# Altium PCB radxa_cm3_io_board_v1330.PcbDoc (part 7 of 8)
Units mil, origin at the board's own origin, x right, y up, seen from the top; angles counter-clockwise.
Board outline 6299.61 x 3544.09 mil, 4 copper layers (Top, GND, Power, Bottom), stack 35.4 mil thick; 547 components, 411 nets, 1952 pads, 2650 vias.
Unrouted connection lines stored in the file: 280.
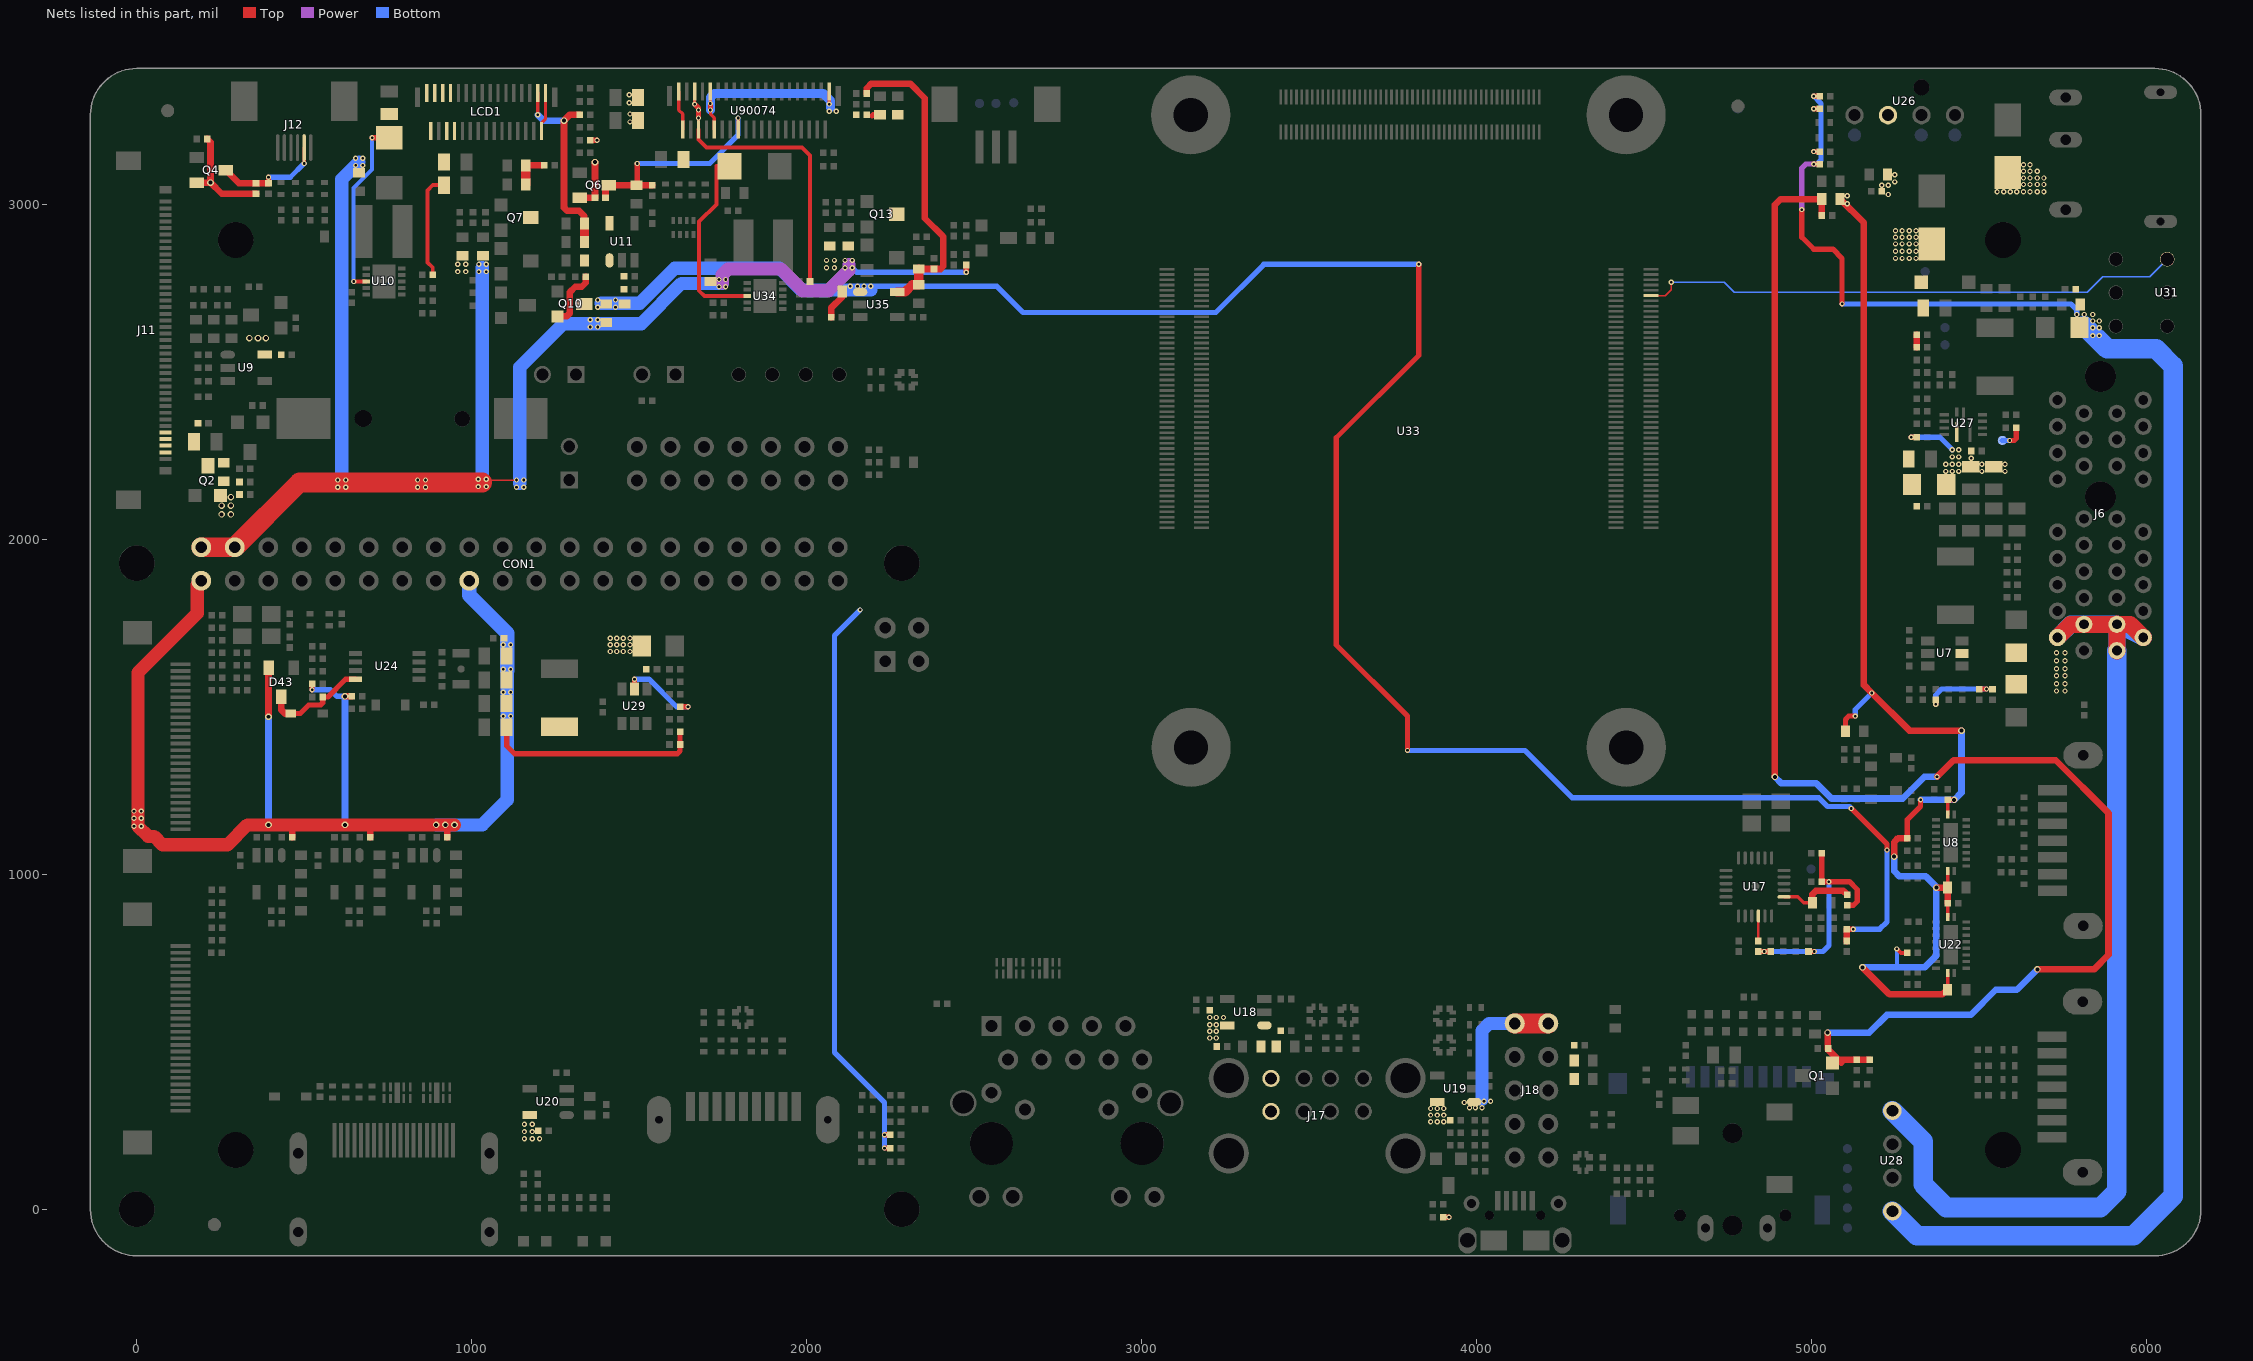
[diagram p9: the nets of this part, all layers, seen from the top]

## Via types
v1: diameter 15.75, hole 7.87, Top to Bottom, 2618 vias
v2: diameter 19.68, hole 11.81, Top to Bottom, 32 vias

## Nets (pads, with @x,y where several pads share a name; then routed paths per layer and width w, separated by ;. In a path a pad name is that pad's centre, name@x,y a point inside that pad or via, vN(x,y) a via of type N, cw(c..) or ccw(c..) an arc to the next point about the centre after c; other vN are vias at no path point) (continued)
VCC3V3_SYS: C29.1 C30.1 C45.1 C109.1 C111.1 C148.1 C149.1 C150.1 C154.1 C155.1 C156.1 CON1.1 CON1.17 D43.2 FB2.1 FB3.1 FB4.1 L13.2 Q4.2 Q6.2 R4.2 R10.2 R44.1 R47.2 R61.1 R62.1 R63.2 R138.2 R139.1 R144.1 R157.1 R169.2 R197.1 R207.1 R209.1 R213.1 R9212.2 U8.9 U8.20 U9.5 U22.9 U22.20 | length 10697.2
  Top w3.94: v1(-7.87,1143.7) 3.94,1143.7 ; v1(-7.87,1188.98) -6.12,1188.98 3.94,1178.92
  Top w9.84: C109.1@5405.51,655.51 U22.9@5405.51,705.51 ; U22.20@5405.51,873.23 C111.1@5405.51,913.39 ; C29.1@5405.51,960.63 U8.9@5405.51,1010.63 ; U8.20@5405.51,1178.35 C30.1@5405.51,1222.44
  Top w11.81: v1(5253.94,777.56) 5265.75,765.75 R209.1@5285.43,765.75
  Top w15.75: v1(523.62,1551.18) R138.2@523.62,1568.9 ; C155.1@1104.33,1438.98 1104.33,1383.86 1127.95,1360.24 1614.17,1360.24 1622.05,1368.11 R157.1@1622.05,1387.8 C148.1@1622.05,1425.2 ; R63.2@1354.33,3190.94 v1(1374.02,3190.94) ; v1(2232.28,183.07) R4.2@2250,183.07 ; v1(2232.28,222.44) R10.2@2250,222.44 ; v1(5005.91,3157.48) R213.1@5023.62,3157.48 ; v1(5005.91,3285.43) R144.1@5023.62,3285.43 ; R169.2@5100.39,1427.17 5100.39,1462.6 5110.24,1472.44 v1(5129.92,1472.44) ; R207.1@5285.43,1108.27 5285.43,1163.39 5324.8,1202.76 v1(5324.8,1222.44) ; C30.1@5405.51,1222.44 v2(5425.2,1222.44)
  Top w19.68: Q4.2@179.13,3064.96 v2(220.47,3064.96) ; R47.2@210.63,3194.88 220.47,3185.04 v2(220.47,3064.96) ; R44.1@356.3,3031.5 253.94,3031.5 v2(220.47,3064.96) ; v2(393.7,1470.47) D43.2@393.7,1616.14 ; FB3.1@464.57,1110.24 464.57,1147.64 ; v2(622.05,1531.5) R139.1@641.73,1531.5 ; FB4.1@696.85,1110.24 696.85,1147.64 ; FB2.1@927.17,1110.24 v2@927.17,1147.64 ; Q6.2@1322.83,3019.69 R61.1@1368.11,3019.68 v2(1368.11,3125.98) ; R9212.2@5084.65,3015.75 5155.51,2944.88 5155.51,1564.96 v1(5179.13,1541.34) 5291.34,1429.13 v2(5446.85,1429.13) ; v2(5151.57,722.44) 5232.28,641.73 5389.76,641.73 5401.57,653.54 C109.1@5405.51,655.51 ; v2(5246.06,1053.15) 5246.06,1096.46 5257.87,1108.27 R207.1@5285.43,1108.27 ; C111.1@5405.51,913.39 C29.1@5405.51,959.77 ; C29.1@5402.69,960.63 C29.1@5405.51,960.63 ; C29.1@5402.69,960.63 C29.1@5405.51,959.77 ; C29.1@5402.69,960.63 v2(5372.05,960.63) C29.1@5405.51,960.63 ; C29.1@5405.51,959.77 C29.1@5405.51,960.63
  Top w39.37: CON1.1@192.91,1876.38 181.1,1864.57 181.1,1779.53 3.94,1602.36 3.94,1178.92 3.94,1143.7 34.45,1113.19 52.17,1113.19 76.77,1088.58 271.65,1088.58 330.71,1147.64 v2(393.7,1147.64) 464.57,1147.64 v2(622.05,1147.64) 696.85,1147.64 v2(893.7,1147.64) v2(921.26,1147.64) 927.17,1147.64 v2(948.82,1147.64)
  Bottom w3.94: v1(1094.49,1543.31) 1106.3,1555.12 1108.27,1557.09 1108.27,1561.02 1106.3,1562.99 ; v1(1094.49,1612.2) 1106.3,1600.39
  Bottom w11.81: 5253.94,722.44 v1(5253.94,777.56)
  Bottom w15.75: v1(523.62,1551.18) 578.74,1551.18 598.43,1531.5 v2(622.05,1531.5) ; v1(2159.45,1789.37) 2082.68,1712.6 2082.68,468.5 2232.28,318.9 v1(2232.28,183.07) ; v1(5129.92,1472.44) 5129.92,1492.13 v1(5179.13,1541.34)
  Bottom w19.68: v2(393.7,1147.64) v2(393.7,1470.47) ; v2(622.05,1147.64) v2(622.05,1531.5) ; v2(5151.57,722.44) 5253.94,722.44 5336.61,722.44 5372.05,757.87 v2(5372.05,960.63) 5372.05,962.6 5340.55,994.09 5261.81,994.09 5246.06,1009.84 v2(5246.06,1053.15) ; v1(5324.8,1222.44) v2(5425.2,1222.44) 5446.85,1244.09 v2(5446.85,1429.13)
  Bottom w31.5: 1106.3,1608.27 v1@1112.2,1608.27
  Bottom w39.37: v2(893.7,1147.64) v2(921.26,1147.64) v2(948.82,1147.64) 1031.5,1147.64 1106.3,1222.44 1106.3,1555.12 1106.3,1562.99 1106.3,1600.39 1106.3,1608.27
  Bottom w43.31: CON1.17@992.91,1876.38 992.91,1832.68 1106.3,1719.29 1106.3,1608.27
  other v1: 13.78,1143.7 -7.87,1167.32 13.78,1167.32 13.78,1188.98 1094.49,1472.44 1116.14,1472.44 1116.14,1543.31 1116.14,1612.2 1094.49,1685.04 1116.14,1685.04 958.66,2799.21 982.28,2799.21 2059.06,2811.02 2082.68,2811.02 958.66,2820.87 982.28,2820.87 2059.06,2832.68 2082.68,2832.68 5106.3,3001.97 5106.3,3025.59
  other v2: 336.61,2600.39 362.2,2600.39 385.83,2600.39
VCC3V3_TP: C48.1 J12.2 Q4.3 R44.2 | length 332.6
  Top w9.84: v1(500,3122.05) J12.2@500,3169.29
  Top w15.75: C48.1@393.7,3062.99 v1(393.7,3080.71)
  Top w19.68: Q4.3@265.75,3102.36 305.12,3062.99 R44.2@356.3,3062.99 C48.1@393.7,3062.99
  Bottom w15.75: v1(393.7,3080.71) 458.66,3080.71 v1(500,3122.05)
VCC5V0_USB: C91.1 C95.1 C99.1 C130.1 C131.1 CON1.2 CON1.4 FB1.1 FB5.1 Q10.2 R64.1 R113.1 R118.1 R148.1 R162.2 R163.2 R198.1 R211.1 R217.1 R223.1 U18.5 U19.5 U20.5 U28.4 | length 10362.8
  Top w3.94: v1(600.39,2155.51) 600.39,2169.29 v1(600.39,2177.17) 608.27,2169.29 610.24,2167.32 612.2,2169.29 620.08,2177.17 v1(624.02,2177.17) 624.02,2169.29 v1(624.02,2155.51) ; v1(838.58,2155.51) 848.76,2165.69 ; v1(838.58,2177.17) 838.58,2175.87 845.16,2169.29 848.76,2165.69 ; 850.39,2169.29 850.39,2167.32 848.76,2165.69 ; 860.24,2169.29 862.2,2167.32 ; v1(862.2,2155.51) 862.2,2167.32 ; v1(862.2,2177.17) 862.2,2169.29 862.2,2167.32 ; v1(1019.69,2157.48) 1031.5,2169.29 1041.34,2179.13 v1(1043.31,2179.13) 1043.31,2177.17 v1(1133.86,2177.17)
  Top w15.75: v1(2476.38,2797.24) R223.1@2476.38,2818.9 ; R118.1@3899.61,-23.62 v1(3917.32,-23.62) ; v1(4970.47,2984.25) 4970.47,2901.57 5005.91,2866.14 5062.99,2866.14 5090.55,2838.58 v1(5090.55,2702.76) ; v1(5005.91,3120.08) R217.1@5023.62,3120.08 ; v1(5005.91,3322.83) R211.1@5023.62,3322.83
  Top w19.68: Q10.2@1256.28,2665.26 1256.37,2665.35 1283.46,2665.35 1293.31,2675.2 1293.31,2738.19 1309.06,2753.94 1328.74,2753.94 1340.55,2765.75 R163.2@1340.55,2783.46
  Top w59.06: CON1.2@192.91,1976.38 CON1.4@292.91,1976.38 485.83,2169.29 600.39,2169.29 608.27,2169.29 612.2,2169.29 624.02,2169.29 845.16,2169.29 850.39,2169.29 860.24,2169.29 862.2,2169.29 1017.72,2169.29 1031.5,2169.29
  Power w3.94: v1(1738.19,2753.94) 1748.03,2763.78 1748.03,2765.75 ; v1(2114.17,2832.68) 2125.98,2820.87
  Power w15.75: v1(4970.47,2984.25) 4970.47,3108.27 4982.28,3120.08 v1(5005.91,3120.08)
  Power w39.37: 1748.03,2765.75 1748.03,2789.37 1765.75,2807.09 1923.23,2807.09 1988.19,2742.13 2064.96,2742.13 2125.98,2803.15 2125.98,2820.87
  Bottom w3.94: v1(600.39,2155.51) 612.2,2167.32 ; 612.2,2167.19 623.89,2155.51 v1(624.02,2155.51) ; 663.39,3125.98 v1(675.2,3137.8) ; v1(1019.69,2157.48) 1030.81,2168.6 ; v1(1019.69,2179.13) 1020.27,2179.13 1030.81,2168.6 ; v1(1021.65,2820.87) 1031.5,2811.02 ; 1030.5,2168.3 1031.37,2168.3 ; 1031.5,2171.26 1031.5,2169.29 1030.81,2168.6 ; v1(1043.31,2157.48) 1042.19,2157.48 1031.37,2168.3 ; v1(1043.31,2179.13) 1032.47,2168.3 1031.37,2168.3 ; v1(1133.86,2155.51) 1145.67,2167.32 1143.7,2167.32 ; v1(1375.98,2633.86) 1375.98,2643.7 ; 1748.03,2763.78 v1(1757.87,2753.94) ; 5812.99,2637.8 v1(5812.99,2671.26)
  Bottom w15.75: v1(2135.83,2811.02) 2149.61,2797.24 v1(2476.38,2797.24) ; v1(5005.91,3120.08) 5015.75,3120.08 5027.56,3131.89 5027.56,3301.18 v1(5005.91,3322.83) ; v1(5090.55,2702.76) 5773.62,2702.76 5791.34,2685.04 v1(5791.34,2671.26)
  Bottom w39.37: 612.2,2165.35 612.2,2167.19 612.2,2167.32 612.2,3074.8 v1(653.54,3116.14) 663.39,3125.98 ; 1031.5,2171.26 1031.5,2811.02 ; 1143.7,2167.32 1143.7,2513.78 1273.62,2643.7 1375.98,2643.7 1505.91,2643.7 1625.98,2763.78 1748.03,2763.78
  Bottom w59.06: U28.4@5240.55,-5.51 5313.78,-78.74 5960.63,-78.74 6078.74,39.37 6078.74,2517.72 6027.56,2568.9 5881.89,2568.9 5812.99,2637.8
  other v1: 1157.48,210.63 1181.1,210.63 1202.76,210.63 1157.48,232.28 1181.1,232.28 1157.48,253.94 1181.1,253.94 3862.2,261.81 3881.89,261.81 3901.57,261.81 3862.2,281.5 3881.89,281.5 3901.57,281.5 3862.2,301.18 3881.89,301.18 3901.57,301.18 3202.76,511.81 3222.44,511.81 3202.76,531.5 3222.44,531.5 3202.76,551.18 3222.44,551.18 3202.76,572.83 3222.44,572.83 3244.09,572.83 1155.51,2155.51 1155.51,2177.17 5838.58,2608.27 5858.27,2608.27 5838.58,2631.89 5858.27,2631.89 1354.33,2633.86 5838.58,2651.57 5858.27,2651.57 1354.33,2655.51 1375.98,2655.51 5838.58,2671.26 1738.19,2775.59 1757.87,2775.59 1021.65,2799.21 1043.31,2799.21 2114.17,2811.02 1043.31,2820.87 2135.83,2832.68 675.2,3116.14 653.54,3137.8
VCC5V0_USB1: C92.1 C93.1 C94.1 J17.1 J17.5 U18.1
VCC5V0_USB2: C96.1 C97.1 C98.1 J18.1 J18.2 U19.1 | length 551.2
  Top w3.94: v1(3978.35,303.15) 3978.35,320.86 U19.1@3992.13,320.87
  Top w59.06: J18.1@4113.39,555.12 J18.2@4213.39,555.12
  Bottom w3.94: 4015.75,328.74 v1(4021.65,322.83)
  Bottom w39.37: 4015.75,328.74 4015.75,533.46 4037.4,555.12 J18.2@4213.39,555.12
  other v1: 3996.06,303.15 4015.75,303.15 3962.6,318.9 4041.34,322.83
VCC5V_P: C59.1 C85.1 C157.1 C158.1 C169.1 L4.1 Q10.3 R70.1 R162.1 R205.1 U11.1 U35.1 | length 6312.7
  Top w15.75: v1(3793.31,1370.08) 3793.31,1472.44 3580.71,1685.04 3580.71,2303.15 3826.77,2549.21 v1(3826.77,2820.87) ; L4.1@5104.33,836.61 v1(5124.02,836.61) ; v1(5118.11,1196.85) 5224.41,1090.55 v1(5224.41,1072.83)
  Top w19.68: R205.1@2072.83,2663.39 2072.83,2690.58 C169.1@2106.66,2724.41 ; C85.1@5104.33,801.18 L4.1@5104.33,836.61
  Bottom w3.94: v1(1375.98,2714.57) 1385.83,2704.72 ; 2129.92,2744.09 v1(2129.92,2755.91) ; 2149.93,2744.09 2151.57,2745.73 v1(2151.57,2755.91) ; 2190.94,2744.09 v1(2190.94,2755.91)
  Bottom w15.75: v1(2190.94,2755.91) 2566.93,2755.91 2645.67,2677.17 3220.96,2677.17 3364.66,2820.87 v1(3826.77,2820.87) ; v1(3793.31,1370.08) 4143.7,1370.08 4285.43,1228.35 5021.65,1228.35 5047.24,1202.76 5112.2,1202.76 v1(5118.11,1196.85) ; v1(5124.02,836.61) 5202.76,836.61 5224.41,858.27 v1(5224.41,1072.83)
  Bottom w39.37: 1385.83,2704.72 1501.97,2704.72 1606.3,2809.06 1919.29,2809.06 1984.25,2744.09 2129.92,2744.09 2149.93,2744.09 2190.94,2744.09
  other v1: 1375.98,2692.91 1429.13,2692.91 1429.13,2714.57 2171.26,2755.91
VCC12V: C10.1 C11.1 C27.1 C28.1 C38.1 C126.1 C127.1 C132.1 C133.1 C134.1 C146.1 C147.1 J6.A2 J6.A3 J6.B1 J6.B2 J6.B3 Q2.2 R14.1 R36.1 R37.1 R149.2 R150.1 R158.1 U7.5 U26.2 U27.1 U28.1 U29.5 | length 4046.1
  Top w3.94: C127.1@5226.38,3088.58 v1(5248.03,3088.58)
  Top w15.75: U29.5@1486.22,1553.15 v1(1486.22,1582.68) ; R158.1@1622.05,1500 v1(1645.67,1500) ; v1(5297.24,2305.12) R149.2@5312.99,2305.12 ; v1(5370.08,1507.87) R14.1@5370.08,1521.65 ; C11.1@5500,1553.15 v1(5521.65,1553.15)
  Top w51.18: J6.A2@5733.46,1707.09 5772.44,1746.06 ; J6.B1@5910.63,1667.72 J6.B3@5910.63,1746.06 ; J6.B3@5910.63,1746.46 J6.B3@5910.63,1746.06 ; J6.B2@5989.37,1707.09 5950.39,1746.06 ; 5772.44,1746.06 5950.39,1746.06 ; 5772.44,1746.06 J6.B3@5910.63,1746.06 ; J6.B3@5910.63,1746.06 5950.39,1746.06
  Bottom w15.75: v1(1486.22,1582.68) 1529.53,1582.68 1612.2,1500 v1(1645.67,1500) ; v1(5297.24,2305.12) 5381.89,2305.12 v1(5419.29,2267.72) ; v1(5370.08,1507.87) 5370.08,1535.43 5387.8,1553.15 v1(5521.65,1553.15)
  Bottom w51.18: J6.A2@5733.46,1707.09 5772.83,1746.46 J6.A3@5812.2,1746.46 J6.B3@5910.63,1746.46 ; J6.B1@5910.63,1667.72 J6.B3@5910.63,1746.46 ; J6.B2@5989.37,1707.09 J6.B3@5910.63,1746.46
  Bottom w59.06: U28.1@5240.55,294.49 5332.68,202.36 5332.68,74.8 5401.57,5.91 5861.42,5.91 5910.63,55.12 J6.B1@5910.63,1667.72
  other v1: 5730.31,1547.24 5755.91,1547.24 5730.31,1568.9 5755.91,1568.9 5730.31,1592.52 5755.91,1592.52 5730.31,1614.17 5755.91,1614.17 5730.31,1637.8 5755.91,1637.8 5730.31,1661.42 5755.91,1661.42 1413.39,1665.35 1433.07,1665.35 1452.76,1665.35 1472.44,1665.35 1413.39,1685.04 1433.07,1685.04 1452.76,1685.04 1472.44,1685.04 1413.39,1704.72 1433.07,1704.72 1452.76,1704.72 1472.44,1704.72 5399.61,2202.76 5419.29,2202.76 5438.98,2202.76 5507.87,2202.76 5576.77,2202.76 5399.61,2224.41 5419.29,2224.41 5438.98,2224.41 5507.87,2224.41 5576.77,2224.41 5476.38,2242.13 5419.29,2246.06 5438.98,2246.06 5438.98,2267.72 5228.35,3029.53 5208.66,3057.09 5228.35,3057.09 5248.03,3066.93
  other v2: 253.94,2074.8 281.5,2074.8 253.94,2100.39 281.5,2100.39 281.5,2125.98
VCC12V_DCIN: C140.1 C142.1 C151.2 C152.1 D45.2 D46.2 D47.2 P5.1 R150.2 R151.2 TP9.1 | length 37.4
  Top w19.68: R151.2@5312.99,2572.83 C152.1@5312.99,2610.24
  other v1: 5250,2838.58 5269.69,2838.58 5291.34,2838.58 5311.02,2838.58 5250,2860.24 5269.69,2860.24 5291.34,2860.24 5311.02,2860.24 5250,2881.89 5269.69,2881.89 5291.34,2881.89 5311.02,2881.89 5250,2901.57 5269.69,2901.57 5291.34,2901.57 5311.02,2901.57 5250,2921.26 5269.69,2921.26 5291.34,2921.26 5311.02,2921.26 5553.15,3037.4 5572.83,3037.4 5592.52,3037.4 5612.2,3037.4 5631.89,3037.4 5651.57,3037.4 5673.23,3037.4 5692.91,3037.4 5631.89,3059.06 5651.57,3059.06 5673.23,3059.06 5692.91,3059.06 5631.89,3078.74 5651.57,3078.74 5673.23,3078.74 5692.91,3078.74 5631.89,3098.43 5651.57,3098.43 5673.23,3098.43 5631.89,3118.11 5651.57,3118.11
VCC12V_LCD: C37.1 C39.1 J11.36 J11.37 J11.38 J11.39 Q2.3 R36.2
VCC_1V8_1: C60.1 C61.1 C62.1 LCD1.29 U11.5 | length 613.9
  Top w9.84: v1(1196.85,3267.72) LCD1.29@1196.85,3332.68
  Top w19.68: C62.1@1322.83,3267.72 1293.31,3267.72 v2(1275.59,3250) 1275.59,2990.16 1285.43,2980.31 1320.87,2980.31 1336.61,2964.57 C61.1@1336.61,2942.91
  Top w27.56: C60.1@1336.61,2887.8 C61.1@1336.61,2942.91
  Bottom w19.68: v1(1196.85,3267.72) 1214.57,3250 v2(1275.59,3250)
VCC_1V8_2: C170.1 C171.1 C172.1 R9210.1 U35.5 | length 934.7
  Top w19.68: R9210.1@2179.13,3330.71 2179.13,3346.46 2192.91,3360.24 2309.06,3360.24 2352.36,3316.93 2352.36,2958.66 2407.48,2903.54 2407.48,2814.96 2399.61,2807.09 C172.1@2379.92,2807.09 C171.1@2334.65,2807.09
  Top w27.56: U35.5@2269.68,2738.19 2293.31,2738.19 2314.96,2759.84 C170.1@2334.65,2759.84 C171.1@2334.65,2807.09
VCC_3_3V: L3.2 R91.1 R94.1 R96.1 R105.1 R106.1 | length 716.9
  Top w15.75: R106.1@4840.55,769.68 v1(4858.27,769.68) R94.1@4877.95,769.68 ; R105.1@4990.16,769.68 v1(5007.87,769.68) ; R96.1@5029.53,1062.99 R91.1@5029.53,978.35 v1(5051.18,978.35) 5112.2,978.35 5135.83,954.72 5135.83,919.29 5124.02,907.48 L3.2@5106.3,907.48
  Bottom w15.75: v1(4858.27,769.68) v1(5007.87,769.68) 5033.46,769.68 5051.18,787.4 v1(5051.18,978.35)
VCC_LCD_MIPI: C56.1 C57.1 C58.1 LCD1.30 LCD1.31 Q7.3 | length 222.4
  Top w9.84: LCD1.30@1208.66,3219.5 1208.66,3244.09 1220.47,3255.91 LCD1.31@1220.47,3332.68
  Top w19.68: C56.1@1161.42,3116.14 C57.1@1208.66,3116.14
  Top w27.56: C58.1@1161.42,3059.06 C56.1@1161.42,3116.14
VCC_LCD_MIPI_2: C166.1 C167.1 C168.1 Q13.3 R9211.1 U90074.1 U90074.30 U90074.31 | length 632.6
  Top w9.84: v1(1712.6,3281.5) 1712.6,3269.68 1724.41,3257.87 U90074.30@1724.41,3223.43 ; v1(1712.6,3301.18) U90074.31@1712.6,3336.61 ; v1(2066.93,3299.21) U90074.1@2066.93,3336.61
  Top w15.75: v1(1712.6,3281.5) v1(1712.6,3301.18) ; 2194.88,3263.78 2198.82,3267.72 C168.1@2218.5,3267.72
  Bottom w3.94: 2070.87,3289.37 2076.77,3289.37 v1(2088.58,3277.56)
  Bottom w27.56: v1(1712.6,3281.5) 1712.6,3318.9 1724.41,3330.71 2049.21,3330.71 2070.87,3309.06 2070.87,3289.37
  other v1: 2066.93,3277.56
VCC_LDO5V: P4.1 R155.1 | length 75.3
  Top w15.75: v1(5590.55,2295.28) 5604.33,2295.28 5610.24,2301.18 R155.1@5610.24,2332.68
  Bottom w15.75: P4.1@5568.9,2295.28 v1(5590.55,2295.28)
VCC_LEDA1: C51.1 D13.2 LCD1.1 LCD1.2 LCD1.3 U10.8 | length 540.5
  Top w11.81: v1(647.64,2769.68) U10.8@685.04,2769.68
  Top w15.75: v1(702.76,3198.82) D13.2@753.94,3198.82
  Bottom w11.81: v1(647.64,2769.68) 647.64,3049.21 702.76,3104.33 v1(702.76,3198.82)
VCC_LEDA2: C161.1 D50.2 U34.8 U90074.38 U90074.39 | length 700.9
  Top w9.84: U90074.39@1618.11,3336.61 1618.11,3281.5 1629.92,3269.68 U90074.38@1629.92,3223.43
  Top w11.81: D50.2@1769.69,3114.17 1730.31,3114.17 1730.31,3000 1679.13,2948.82 1679.13,2742.13 1694.88,2726.38 U34.8@1822.83,2726.38
VCC_LEDK1: LCD1.5 LCD1.6 LCD1.7 LCD1.8 R53.2 R55.1 R56.1 | length 314.2
  Top w11.81: R53.2@883.86,2789.37 883.86,2811.02 868.11,2826.77 868.11,3041.34 883.86,3057.09 R55.1@917.32,3057.09
VCC_LEDK2: R188.2 R189.1 R192.1 U90074.34 U90074.35 | length 876.8
  Top w9.84: v1(1665.35,3299.21) U90074.35@1665.35,3336.61 ; U90074.34@1677.17,3223.43 v1(1677.17,3257.87)
  Top w11.81: U90074.34@1677.17,3223.43 1677.17,3192.91 1700.79,3169.29 1986.22,3169.29 2009.84,3145.67 R188.2@2009.84,2769.68
  Top w15.75: v1(1665.35,3299.21) 1677.17,3287.4 v1(1677.17,3281.5) v1(1677.17,3257.87)
  other v1: 1472.44,3246.06 1472.44,3269.68 1470.47,3303.15 1470.47,3326.77
VCC_RTC: C125.1 D42.2 D43.3 U24.8 | length 317.5
  Top w15.75: D42.2@460.63,1480.31 488.19,1480.31 513.78,1505.91 549.21,1505.91 555.12,1511.81 C125.1@555.12,1529.53 570.87,1529.53 624.13,1582.79 U24.8@653.53,1582.79
  Top w19.68: D43.3@431.1,1529.52 431.1,1492.13 442.91,1480.31 D42.2@460.63,1480.31
VCC_TP: C52.1 C54.1 Q6.3 R61.2 U90074.24 | length 660.2
  Top w9.84: U90074.24@1795.28,3223.43 v1(1795.28,3257.87)
  Top w15.75: C54.1@1494.09,3057.09 v1(1494.09,3122.05)
  Top w19.68: R61.2@1399.61,3019.68 1399.61,3047.24 Q6.3@1409.45,3057.09 C54.1@1492.13,3057.09 ; C54.1@1494.09,3057.09 C54.1@1492.13,3057.09 ; C52.1@1539.37,3057.09 C54.1@1492.13,3057.09
  Bottom w15.75: v1(1494.09,3122.05) 1710.63,3122.05 1795.28,3206.69 v1(1795.28,3257.87)
VCCIO_SD: C6.1 Q1.2 R12.1 R184.1 R220.1 R9212.1 | length 4602
  Top w3.94: C6.1@5131.89,446.85 5131.89,448.82 C6.1@5133.86,446.85
  Top w19.68: v2(4889.76,1291.34) 4889.76,2998.03 4907.48,3015.75 R9212.1@5029.53,3015.75 R184.1@5029.53,2966.54 ; v2(5047.24,527.56) 5047.24,478.35 Q1.2@5079.72,445.87 ; 5087.84,437.61 5087.84,437.75 Q1.2@5079.72,445.87 ; R12.1@5173.23,446.85 5131.89,446.85 5080.71,446.85 Q1.2@5079.72,445.87 ; v1(5374.02,1291.34) 5423.23,1340.55 5728.35,1340.55 5885.83,1183.07 5885.83,759.84 5842.52,716.54 v2(5673.23,716.54)
  Bottom w19.68: v2(4889.76,1291.34) 4909.45,1271.65 5013.78,1271.65 5059.06,1226.38 5271.65,1226.38 5336.61,1291.34 v1(5374.02,1291.34) ; v2(5047.24,527.56) 5171.26,527.56 5224.41,580.71 5474.41,580.71 5549.21,655.51 5612.2,655.51 v2(5673.23,716.54)
VD33: C83.2 L3.1 U17.20 | length 230.9
  Top w9.84: U17.20@4917.32,933.07 4958.66,933.07 4976.38,915.35 C83.2@5001.97,915.35
  Top w19.68: C83.2@5001.97,915.35 5001.97,940.94 5011.81,950.79 5094.49,950.79 L3.1@5106.3,938.98
WL_NDIS: U31.1 U33.89 | length 1623
  Top w3.94: U33.89@4520.47,2727.76 4562.99,2727.76 4580.71,2745.47 v1(4580.71,2767.72)
  Bottom w3.94: v1(4580.71,2767.72) 4738.86,2767.72 4768.39,2738.19 5822.83,2738.19 5868.11,2783.46 6008.27,2783.46 U31.1@6061.02,2836.22
XRSTJ: R106.2 U17.16 | length 74.8
  Top w7.87: R106.2@4840.55,801.18 U17.16@4840.55,875.98
pads on no net: BAT1.4 BAT1.5 CN14A1.14 CN14A1.15 H100.1 H101.1 H102.1 H103.1 H104.1 H105.1 H106.1 H107.1 J1.14 J3.21 J3.22 J6.A7 J6.B5 J6.B6 J6.B17 J6.C1 J6.C2 J8.1 J8.7 J8.8 J11.1 J11.22 J11.27 J11.34 J11.35 J11.40 J11.41 J11.42 J14.7 J14.9 J14.15 J14.22 J14.23 J14.25 J14.26 J15.7 J15.9 J15.15 J15.22 J15.23 J15.25 J15.26 J16.10 J16.11 J16.12 J16.13 J18.9 J18.10 J24.16 J24.91 LCD1.4 LCD1.26 LCD1.32 LCD1.33 M1.1 M2.1 M3.1 M4.1 M5.1 U10.1 U10.3 U10.6 U10.10 U12.4 U14.4 U15.4 U17.2 U17.22 U17.23 U17.24 U23.3 U23.4 U26.5 U27.4 U27.12 U33.64 U33.68 U33.70 U33.72 U33.73 U33.104 U33.106 U33.133 U33.135 U33.139 U33.141 U33.143 U33.145 U33.146 U33.147 U33.148 U33.149 U33.152 U33.154 U33.158 U33.160 U33.164 U33.166 U34.1 U34.3 U34.6 U34.10 U90074.3 U90074.5 U90074.36 U90074.37 Y2.3

## Polygon pours and split planes (outlines as drawn)
GND on Power (solid, remove dead copper, pour order 6): -163.39,1177.17 -163.39,1139.76 -110.24,1139.76 -110.24,1177.17
VCC3V3_SYS on Power (solid, remove dead copper, pour order 4): -104.33,1129.92 124.02,1129.92 124.02,2586.61 1541.34,2586.61 1541.34,1773.62 5187.01,1773.62 5187.01,3374.02 1.97,3374.02 -104.33,3267.72
GND on Power (solid, remove dead copper, pour order 2): -110.24,1124.02 -110.24,1153.54 -163.39,1153.54 -163.39,-165.35 6188.98,-165.35 6188.98,3431.1 -163.39,3431.1 -163.39,1163.39 -110.24,1163.39 -110.24,3267.72 1.97,3379.92 5192.91,3379.92 5192.91,3318.9 5779.53,3318.9 5779.53,2688.98 6133.86,2688.98 6133.86,-3.94 6039.37,-98.43 124.02,-98.43 124.02,1124.02
VCC5V0_USB on Power (solid, remove dead copper, pour order 1): 6127.95,0 6127.95,2683.07 5779.53,2683.07 5779.53,935.04 4970.47,935.04 4970.47,712.6 3596.46,712.6 3374.02,935.04 877.95,935.04 877.95,2192.91 305.12,2192.91 305.12,2055.12 129.92,2055.12 129.92,-92.52 6035.43,-92.52
VCC12V on Power (solid, remove dead copper, pour order 0): 5192.91,3312.99 5192.91,1767.72 1535.43,1767.72 1535.43,2580.71 129.92,2580.71 129.92,2061.02 299.21,2061.02 299.21,2198.82 883.86,2198.82 883.86,940.94 3377.95,940.94 3598.43,720.47 4962.6,720.47 4962.6,940.94 5773.62,940.94 5773.62,3312.99
GND on Top (solid, remove dead copper, pour order 3): -147.64,3415.35 -147.64,-149.61 6173.23,-149.61 6173.23,3415.35
GND on Bottom (solid, remove dead copper, pour order 5): -171.26,3438.98 -171.26,-173.23 6196.85,-173.23 6196.85,3438.98
GND on GND (split plane): 6050.96,3403.15 6068.4,3398.48 6085.09,3391.57 6100.73,3382.53 6115.07,3371.54 6127.84,3358.77 6138.83,3344.44 6147.87,3328.79 6154.78,3312.1 6159.45,3294.66 6161.81,3276.75 6161.81,3267.72 6161.81,-0.79 6161.81,-9.82 6159.45,-27.73 6154.78,-45.18 6147.87,-61.86 6138.83,-77.51 6127.84,-91.84 6115.07,-104.61 6100.73,-115.61 6085.09,-124.64 6068.4,-131.55 6050.96,-136.23 6033.05,-138.58 -9.03,-138.58 -26.94,-136.23 -44.39,-131.55 -61.08,-124.64 -76.72,-115.61 -91.05,-104.61 -103.82,-91.84 -114.82,-77.51 -123.85,-61.86 -130.76,-45.18 -135.44,-27.73 -137.8,-9.82 -137.8,-0.79 -137.8,3267.72 -137.8,3276.75 -135.44,3294.66 -130.76,3312.1 -123.85,3328.79 -114.82,3344.44 -103.82,3358.77 -91.05,3371.54 -76.72,3382.53 -61.08,3391.57 -44.39,3398.48 -26.94,3403.15 -9.03,3405.51 6033.05,3405.51

## Keep-outs
Top:
  region: 5767.72,1039.37 5757.87,1039.37 5757.87,1009.84 5767.72,1009.84 5767.72,1039.37
  region: 5444.88,2653.54 5647.64,2653.54 5647.64,2409.45 5444.88,2409.45 5444.88,2653.54
  region: 3202.76,2659.45 3218.5,2659.45 3218.5,2496.06 3202.76,2496.06 3202.76,2659.45
  region: 5466.54,387.8 5476.38,387.8 5476.38,338.58 5466.54,338.58 5466.54,387.8
  region: 1742.13,2998.03 1730.31,2998.03 1730.31,2948.82 1742.13,2948.82 1742.13,2998.03
  region: 5533.46,1043.31 5539.37,1043.31 5539.37,1003.94 5533.46,1003.94 5533.46,1043.31
  region: 1590.55,2946.85 1669.29,2946.85 1669.29,2901.57 1590.55,2901.57 1590.55,2946.85
  region: 181.1,472.44 330.71,472.44 330.71,431.1 181.1,431.1 181.1,472.44
  region: 5372.05,1610.24 5364.17,1610.24 5364.17,1564.96 5372.05,1564.96 5372.05,1610.24
  region: 488.19,1037.4 576.77,1037.4 576.77,1047.24 488.19,1047.24 488.19,1037.4
  region: 2614.17,3297.24 2480.31,3297.24 2480.31,3279.53 2614.17,3279.53 2614.17,3297.24
  region: 1602.36,2998.03 1696.85,2998.03 1696.85,2980.31 1602.36,2980.31 1602.36,2998.03
  region: 5767.72,1185.04 5757.87,1185.04 5757.87,1159.45 5767.72,1159.45 5767.72,1185.04
  region: 5537.4,2299.21 5582.68,2299.21 5582.68,2303.15 5537.4,2303.15 5537.4,2299.21
  region: 246.06,1832.68 202.76,1832.68 202.76,1840.55 246.06,1840.55 246.06,1832.68
  region: 5332.68,2295.28 5328.74,2295.28 5328.74,2269.68 5332.68,2269.68 5332.68,2295.28
  region: 1291.34,51.18 1352.36,51.18 1352.36,39.37 1291.34,39.37 1291.34,51.18
  region: 4360.24,2096.46 4356.3,2096.46 4356.3,2062.99 4360.24,2062.99 4360.24,2096.46
  region: 4370.08,1659.45 4413.39,1659.45 4413.39,1651.57 4370.08,1651.57 4370.08,1659.45
  region: 198.82,1374.02 911.42,1374.02 911.42,1271.65 198.82,1271.65 198.82,1374.02
  region: 5330.71,2289.37 5411.42,2289.37 5411.42,2293.31 5330.71,2293.31 5330.71,2289.37
  region: 234.25,1639.76 324.8,1639.76 324.8,1651.57 234.25,1651.57 234.25,1639.76
  region: 5354.33,2507.87 5446.85,2507.87 5446.85,2488.19 5354.33,2488.19 5354.33,2507.87
  region: 62.99,2395.67 110.24,2395.67 110.24,2187.01 62.99,2187.01 62.99,2395.67
  region: 1812.99,3053.15 1960.63,3053.15 1960.63,2791.34 1812.99,2791.34 1812.99,3053.15
  region: 2976.38,2190.94 2980.31,2190.94 2980.31,2157.48 2976.38,2157.48 2976.38,2190.94
  region: 1427.17,2683.07 1421.26,2683.07 1421.26,2618.11 1427.17,2618.11 1427.17,2683.07
  region: 2017.72,3033.46 2230.31,3033.46 2230.31,3017.72 2017.72,3017.72 2017.72,3033.46
  region: 5301.18,1064.96 5311.02,1064.96 5311.02,1007.87 5301.18,1007.87 5301.18,1064.96
  region: 5547.24,3021.65 5490.16,3021.65 5490.16,3029.53 5547.24,3029.53 5547.24,3021.65
  region: 726.38,1037.4 805.12,1037.4 805.12,1043.31 726.38,1043.31 726.38,1037.4
  region: 5409.45,2372.05 5425.2,2372.05 5425.2,2326.77 5409.45,2326.77 5409.45,2372.05
  region: 5765.75,303.15 5761.81,303.15 5761.81,275.59 5765.75,275.59 5765.75,303.15
  region: 1767.72,2696.85 1730.31,2696.85 1730.31,2641.73 1767.72,2641.73 1767.72,2696.85
  region: 5309.06,1238.19 5399.61,1238.19 5399.61,1222.44 5309.06,1222.44 5309.06,1238.19
  region: 3045.28,2188.98 3039.37,2188.98 3039.37,2104.33 3045.28,2104.33 3045.28,2188.98
  region: 2297.24,332.68 2287.4,332.68 2287.4,309.06 2297.24,309.06 2297.24,332.68
  region: 5377.95,1531.5 5488.19,1531.5 5488.19,1547.24 5377.95,1547.24 5377.95,1531.5
  region: 1159.45,1641.73 1377.95,1641.73 1377.95,1409.45 1159.45,1409.45 1159.45,1641.73
  region: 437.01,2937.01 590.55,2937.01 590.55,2988.19 437.01,2988.19 437.01,2937.01
  region: 1775.59,3072.83 1781.5,3072.83 1781.5,3047.24 1775.59,3047.24 1775.59,3072.83
  region: 2633.86,767.72 2734.25,767.72 2734.25,781.5 2633.86,781.5 2633.86,767.72
  region: 5549.21,818.9 5541.34,818.9 5541.34,736.22 5549.21,736.22 5549.21,818.9
  region: 1200.79,350.39 1179.13,350.39 1179.13,297.24 1200.79,297.24 1200.79,350.39
  region: 2586.61,767.72 2635.83,767.72 2635.83,779.53 2586.61,779.53 2586.61,767.72
  region: 1291.34,3246.06 1387.8,3246.06 1387.8,3190.94 1291.34,3190.94 1291.34,3246.06
  region: 5295.28,972.44 5381.89,972.44 5381.89,974.41 5295.28,974.41 5295.28,972.44
  region: 1314.96,-9.84 1307.09,-9.84 1307.09,-39.37 1314.96,-39.37 1314.96,-9.84
  region: 3029.53,2710.63 3005.91,2710.63 3005.91,2588.58 3029.53,2588.58 3029.53,2710.63
  region: 692.91,354.33 746.06,354.33 746.06,350.39 692.91,350.39 692.91,354.33
  region: 3202.76,2328.74 3210.63,2328.74 3210.63,2259.84 3202.76,2259.84 3202.76,2328.74
  region: 3165.35,474.41 3196.85,474.41 3196.85,468.5 3165.35,468.5 3165.35,474.41
  region: 3202.76,2188.98 3206.69,2188.98 3206.69,2161.42 3202.76,2161.42 3202.76,2188.98
  region: 6102.36,1568.9 6017.72,1568.9 6017.72,1553.15 6102.36,1553.15 6102.36,1568.9
  region: 944.88,1326.77 972.44,1326.77 972.44,1285.43 944.88,1285.43 944.88,1326.77
  region: 5301.18,740.16 5314.96,740.16 5314.96,679.13 5301.18,679.13 5301.18,740.16
  region: 769.69,397.64 923.23,397.64 923.23,419.29 769.69,419.29 769.69,397.64
  region: 2978.35,2179.13 3000,2179.13 3000,2169.29 2978.35,2169.29 2978.35,2179.13
  region: 1192.91,2675.2 1234.25,2675.2 1234.25,2681.1 1192.91,2681.1 1192.91,2675.2
  region: 3053.15,2661.42 3027.56,2661.42 3027.56,2566.93 3053.15,2566.93 3053.15,2661.42
  region: 5312.99,1330.71 5301.18,1330.71 5301.18,1255.91 5312.99,1255.91 5312.99,1330.71
  region: 1000,1275.59 1023.62,1275.59 1023.62,1250 1000,1250 1000,1275.59
  region: 5728.35,2663.39 5767.72,2663.39 5767.72,2649.61 5728.35,2649.61 5728.35,2663.39
  region: 5326.77,1970.47 5531.5,1970.47 5531.5,1753.94 5326.77,1753.94 5326.77,1970.47
  region: 2472.44,1246.06 2460.63,1246.06 2460.63,1208.66 2472.44,1208.66 2472.44,1246.06
  region: 677.17,3055.12 783.46,3055.12 783.46,2840.55 677.17,2840.55 677.17,3055.12
  region: 4234.25,1616.14 4250,1616.14 4250,1539.37 4234.25,1539.37 4234.25,1616.14
  region: 4377.95,897.64 4417.32,897.64 4417.32,885.83 4377.95,885.83 4377.95,897.64
  region: 5336.61,1309.06 5295.28,1309.06 5295.28,1316.93 5336.61,1316.93 5336.61,1309.06
  region: 2938.98,1.97 3043.31,1.97 3043.31,17.72 2938.98,17.72 2938.98,1.97
  region: 1307.09,3344.49 1338.58,3344.49 1338.58,3303.15 1307.09,3303.15 1307.09,3344.49
  region: 974.41,1143.7 950.79,1143.7 950.79,1049.21 974.41,1049.21 974.41,1143.7
  region: 5767.72,456.69 5763.78,456.69 5763.78,425.2 5767.72,425.2 5767.72,456.69
  region: 5385.83,2257.87 5389.76,2257.87 5389.76,2295.28 5385.83,2295.28 5385.83,2257.87
  region: 3222.44,2757.87 3232.28,2757.87 3232.28,2486.22 3222.44,2486.22 3222.44,2757.87
  region: 990.16,3305.12 1127.95,3305.12 1127.95,3246.06 990.16,3246.06 990.16,3305.12
  region: 1954.72,1129.92 1948.82,1129.92 1948.82,1092.52 1954.72,1092.52 1954.72,1129.92
  region: 1848.43,3309.06 1992.13,3309.06 1992.13,3250 1848.43,3250 1848.43,3309.06
  region: 4545.28,328.74 4515.75,328.74 4515.75,338.58 4545.28,338.58 4545.28,328.74
  region: 968.5,1259.84 996.06,1259.84 996.06,1232.28 968.5,1232.28 968.5,1259.84
  region: 5527.56,716.54 5553.15,716.54 5553.15,724.41 5527.56,724.41 5527.56,716.54
  region: 1066.93,500 1102.36,500 1102.36,515.75 1066.93,515.75 1066.93,500
  region: 1730.31,2716.54 1746.06,2716.54 1746.06,2687.01 1730.31,2687.01 1730.31,2716.54
  region: 2942.91,1169.29 2913.39,1169.29 2913.39,1175.2 2942.91,1175.2 2942.91,1169.29
  region: 165.35,533.46 336.61,533.46 336.61,488.19 165.35,488.19 165.35,533.46
  region: 3155.51,2066.93 3151.57,2066.93 3151.57,2094.49 3155.51,2094.49 3155.51,2066.93
  region: 5490.16,2372.05 5496.06,2372.05 5496.06,2309.06 5490.16,2309.06 5490.16,2372.05
Power:
  region: 1657.15,1500 ccw(c1645.67,1500) 1645.67,1511.48 ccw(c1645.67,1500) 1634.19,1500 ccw(c1645.67,1500) 1645.67,1488.52 ccw(c1645.67,1500)
  region: 3281.5,3377.95 3289.37,3377.95 3289.37,3354.33 3281.5,3354.33 3281.5,3377.95
  region: 3356.3,3301.18 3368.11,3301.18 3368.11,3242.13 3356.3,3242.13 3356.3,3301.18
  region: 5310.45,2305.12 ccw(c5297.24,2305.12) 5297.24,2318.32 ccw(c5297.24,2305.12) 5284.04,2305.12 ccw(c5297.24,2305.12) 5297.24,2291.91 ccw(c5297.24,2305.12)
Bottom:
  region: 2364.17,1627.95 2372.05,1627.95 2372.05,1734.25 2364.17,1734.25 2364.17,1627.95
  region: 5269.69,3232.28 5437.01,3232.28 5437.01,3265.75 5269.69,3265.75 5269.69,3232.28
  region: 74.8,2968.5 47.24,2968.5 47.24,2685.04 74.8,2685.04 74.8,2968.5
  region: 3486.22,1627.95 4165.35,1627.95 4165.35,1562.99 3486.22,1562.99 3486.22,1627.95
  region: 503.94,1614.17 500,1614.17 500,1637.8 503.94,1637.8 503.94,1614.17
  region: 4037.4,2948.82 4086.61,2948.82 4086.61,2954.72 4037.4,2954.72 4037.4,2948.82
  region: 5364.17,1045.28 5350.39,1045.28 5350.39,1155.51 5364.17,1155.51 5364.17,1045.28
  region: 1061.02,3078.74 2966.54,3078.74 2966.54,2862.2 1061.02,2862.2 1061.02,3078.74
  region: 1015.75,3259.84 1137.8,3259.84 1137.8,2996.06 1015.75,2996.06 1015.75,3259.84
  region: 956.69,3194.88 1009.84,3194.88 1009.84,3185.04 956.69,3185.04 956.69,3194.88
  region: 1905.51,3212.6 1964.57,3212.6 1964.57,3169.29 1905.51,3169.29 1905.51,3212.6
  region: 1356.3,2694.88 1370.08,2694.88 1370.08,2665.35 1356.3,2665.35 1356.3,2694.88
  region: 5261.81,3232.28 5277.56,3232.28 5277.56,3257.87 5261.81,3257.87 5261.81,3232.28
  region: 3675.2,2897.64 3921.26,2897.64 3921.26,2856.3 3675.2,2856.3 3675.2,2897.64
  region: 3820.87,769.68 3787.4,769.68 3787.4,775.59 3820.87,775.59 3820.87,769.68
  region: 4692.91,899.61 4714.57,899.61 4714.57,907.48 4692.91,907.48 4692.91,899.61
  region: 1988.19,3127.95 2919.29,3127.95 2919.29,3086.61 1988.19,3086.61 1988.19,3127.95
Keep-Out Layer:
  the board outline again, w3.94

## Other copper
Top:
  region net VCC12V_DCIN: 5326.77,2277.56 5171.26,2277.56 5171.26,2080.71 5326.77,2080.71 5326.77,2277.56
  region net VCC5V_P: 1464.57,2795.28 1403.54,2795.28 1403.54,2690.94 1464.57,2690.94 1464.57,2795.28
  region net BAT_3V7_LOSE: 3553.15,3261.81 3590.55,3261.81 3590.55,3342.52 3553.15,3342.52 3553.15,3261.81
  region net VCC12V_DCIN: 5322.83,2561.02 5265.75,2561.02 5265.75,2663.39 5322.83,2663.39 5322.83,2561.02
  region net VCC5V0_USB1: 3342.52,561.02 3425.2,561.02 3425.2,267.72 3342.52,267.72 3342.52,561.02
  region net VCC5V_P: 1311.02,2685.04 1474.41,2685.04 1474.41,2716.54 1311.02,2716.54 1311.02,2685.04
  region net N17840574: 5318.9,2990.16 5456.69,2990.16 5523.62,3057.09 5523.62,3139.76 5610.24,3226.38 5807.09,3226.38 5807.09,3368.11 5525.59,3368.11 5466.54,3309.06 5466.54,3251.97 5444.88,3230.31 5318.9,3230.31 5318.9,2990.16
  region net VCC3V3_SYS: 2051.18,2891.73 2090.55,2891.73 2090.55,2803.15 2051.18,2803.15 2051.18,2891.73
  region net VCC5V_P: 1360.24,2822.83 1427.17,2822.83 1427.17,2692.91 1360.24,2692.91 1360.24,2822.83
  region net VCC3V3_SYS: 942.91,1167.32 968.5,1167.32 968.5,1127.95 942.91,1127.95 942.91,1167.32
  region net VCC3V3_SD_1: 4791.34,322.83 4748.03,322.83 4748.03,488.19 4791.34,488.19 4791.34,322.83
  region net BAT_3V7_LOSE: 2537.4,3289.37 2578.74,3289.37 2578.74,3120.08 2537.4,3120.08 2537.4,3289.37
  region net VCC12V: 228.35,2187.01 316.93,2187.01 316.93,2094.49 287.4,2064.96 228.35,2064.96 228.35,2187.01
  region net N17840574: 5543.31,3194.88 5657.48,3194.88 5716.54,3253.94 5716.54,3267.72 5543.31,3267.72 5543.31,3194.88
  region net VCC5V0_USB: 3234.25,474.41 3188.98,474.41 3188.98,604.33 3234.25,604.33 3234.25,474.41
  region net VCC3V3_SYS: 992.13,2860.24 950.79,2860.24 950.79,2791.34 992.13,2791.34 992.13,2860.24
  region net VCC5V0_USB: 2106.3,2803.15 2143.7,2803.15 2143.7,2889.76 2106.3,2889.76 2106.3,2803.15
  region net VCCIO_SD: 5108.27,417.32 5037.4,417.32 5037.4,539.37 5108.27,539.37 5108.27,417.32
  region net USB_5V_IN: 3466.54,3364.17 3425.2,3364.17 3425.2,3261.81 3466.54,3261.81 3466.54,3364.17
  region net VCC5V0_USB: 3931.1,253.94 3854.33,253.94 3854.33,336.61 3931.1,336.61 3931.1,253.94
  region net N19638712: 1379.92,1505.91 1462.6,1505.91 1462.6,1547.24 1379.92,1547.24 1379.92,1505.91
  region net N17923771: 594.49,3041.34 622.05,3041.34 635.83,3055.12 704.72,3055.12 704.72,2840.55 671.26,2840.55 663.39,2832.68 663.39,2801.18 669.29,2795.28 694.88,2795.28 694.88,2783.46 620.08,2783.46 594.49,2809.06 594.49,3041.34
  region net BAT_3V7_PLUS: 3505.91,3342.52 3543.31,3342.52 3543.31,3261.81 3505.91,3261.81 3505.91,3342.52
  region net +5V_INPUT: 4498.03,2716.54 4620.08,2716.54 4620.08,2629.92 4498.03,2629.92 4498.03,2716.54
  region net N19323495: 5458.66,2334.65 5446.85,2334.65 5446.85,2480.31 5458.66,2492.13 5639.76,2492.13 5639.76,2409.45 5484.25,2409.45 5458.66,2383.86 5458.66,2334.65
  region net VCC12V_LCD: 68.9,2324.8 108.27,2324.8 141.73,2358.27 192.91,2358.27 192.91,2257.87 198.82,2251.97 279.53,2251.97 279.53,2194.88 124.02,2194.88 116.14,2202.76 116.14,2246.06 108.27,2253.94 68.9,2253.94 68.9,2324.8
  region net VCC5V0_USB: 641.73,3078.74 685.04,3078.74 685.04,3145.67 641.73,3145.67 641.73,3078.74
  region net VCC3V3_SYS: 5070.87,2994.09 5116.14,2994.09 5116.14,3039.37 5070.87,3039.37 5070.87,2994.09
  region net VCC_LCD_MIPI: 1147.64,2938.98 1147.64,3147.64 1155.51,3155.51 1194.88,3155.51 1202.76,3163.39 1202.76,3248.03 1214.57,3259.84 1214.57,3360.24 1232.28,3360.24 1232.28,2938.98 1147.64,2938.98
  region net VCC5V0_USB2: 4053.15,336.61 3954.72,336.61 3954.72,309.06 3968.5,295.28 4023.62,295.28 4031.5,303.15 4053.15,303.15 4053.15,336.61
  region net +3V3: 4438.98,2677.17 4336.61,2677.17 4336.61,2698.82 4438.98,2698.82 4438.98,2677.17
  region net VCC_LEDK1: 942.91,3360.24 907.48,3360.24 907.48,3265.75 917.32,3255.91 917.32,3185.04 893.7,3161.42 893.7,3029.53 954.72,3029.53 954.72,3293.31 942.91,3305.12 942.91,3360.24
  region net VCC_1V8_1: 1318.9,2978.35 1423.23,2978.35 1423.23,2870.08 1318.9,2870.08 1318.9,2978.35
  region net 5V0_USB30: 1710.63,253.94 1679.13,253.94 1669.29,244.09 1635.83,244.09 1620.08,228.35 1620.08,188.98 1608.27,177.17 1541.34,177.17 1423.23,295.28 1366.14,295.28 1366.14,216.54 1399.61,216.54 1498.03,118.11 1671.26,118.11 1710.63,157.48 1710.63,253.94
  region net VCC12V_DCIN: 5283.46,2261.81 5171.26,2261.81 5171.26,2933.07 5283.46,2933.07 5283.46,2261.81
  region net N17923199: 954.72,2925.2 1055.12,2925.2 1055.12,2885.83 954.72,2885.83 954.72,2925.2
  region net N17810979: 5785.43,1694.88 5838.58,1694.88 5838.58,1496.06 5785.43,1496.06 5785.43,1694.88
  region net VCC5V0_USB: 1149.61,202.76 1210.63,202.76 1210.63,295.28 1149.61,295.28 1149.61,202.76
  region net VCC12V: 5253.94,3295.28 5216.54,3295.28 5198.82,3277.56 5198.82,3021.65 5244.09,3021.65 5261.81,3039.37 5261.81,3287.4 5253.94,3295.28
  region net VCC12V: 5429.13,1673.23 5486.22,1673.23 5509.84,1696.85 5645.67,1696.85 5685.04,1736.22 5763.78,1736.22 5763.78,1539.37 5488.19,1539.37 5488.19,1631.89 5474.41,1645.67 5429.13,1645.67 5429.13,1673.23
  region net +5V_INPUT: 5490.16,2600.39 5724.41,2600.39 5724.41,2706.69 5490.16,2706.69 5490.16,2600.39
  region net VCC3V3_SD_1: 4757.87,488.19 5027.56,488.19 5027.56,379.92 4757.87,379.92 4757.87,488.19
  region net VCC3V3_SYS: 1084.65,1409.45 1366.14,1409.45 1366.14,1480.31 1084.65,1480.31 1084.65,1409.45
  region net USB_5V_IN: 5070.87,3049.21 5137.8,3049.21 5137.8,3104.33 5070.87,3104.33 5070.87,3049.21
  region net N17923199: 992.13,2954.72 1108.27,2954.72 1108.27,2901.57 992.13,2901.57 992.13,2954.72
  region net VCC_LEDA1: 895.67,3360.24 895.67,3263.78 883.86,3251.97 883.86,3163.39 694.88,3163.39 694.88,3287.4 805.12,3287.4 812.99,3279.53 852.36,3279.53 856.3,3283.46 856.3,3360.24 895.67,3360.24
  region net N17813952: 5374.02,1803.15 5374.02,1683.07 5482.28,1683.07 5509.84,1710.63 5509.84,1803.15 5374.02,1803.15
  region net VCC12V_DCIN: 5352.36,2627.95 5261.81,2627.95 5261.81,2929.13 5352.36,2929.13 5352.36,2627.95
  region net VBUS: 4015.75,124.02 4070.87,124.02 4070.87,7.87 4015.75,7.87 4015.75,124.02
  region net VCC_LEDK2: 1462.6,3346.46 1462.6,3222.44 1515.75,3222.44 1515.75,3346.46 1462.6,3346.46
  region net N17929106: 1781.5,3053.15 1840.55,3053.15 1840.55,2929.13 1781.5,2929.13 1781.5,3053.15
  region net N17841777: 661.42,1543.31 726.38,1543.31 726.38,1484.25 661.42,1484.25 661.42,1543.31
  region net N17923777: 781.5,2783.46 832.68,2783.46 832.68,3084.65 714.57,3084.65 714.57,3013.78 761.81,2966.54 761.81,2840.55 781.5,2820.87 781.5,2783.46
  region net VCC12V: 1500,1533.46 1472.44,1533.46 1472.44,1647.64 1466.54,1653.54 1403.54,1653.54 1403.54,1714.57 1535.43,1714.57 1535.43,1608.27 1500,1572.83 1500,1533.46
  region net VCC5V0_USB2: 4307.09,368.11 4255.91,368.11 4255.91,486.22 4218.5,523.62 4102.36,523.62 4082.68,543.31 4082.68,588.58 4232.28,588.58 4301.18,519.68 4301.18,474.41 4307.09,468.5 4307.09,368.11
  region net VCC3V3_SYS: 1084.65,1718.5 1159.45,1718.5 1159.45,1409.45 1084.65,1409.45 1084.65,1718.5
  region net 5V0_USB30: 1259.84,295.28 1259.84,216.54 1421.26,216.54 1423.23,214.57 1423.23,295.28 1259.84,295.28
  region net VCC3V3_SD_1: 5027.56,539.37 4990.16,539.37 4990.16,437.01 5027.56,437.01 5027.56,539.37
  region net +1V8: 4438.98,2708.66 4336.61,2708.66 4336.61,2730.31 4438.98,2730.31 4438.98,2708.66
  region net VCC3V3_LCD0: 303.15,2537.4 228.35,2537.4 228.35,2500 202.76,2500 202.76,2572.83 192.91,2582.68 131.89,2582.68 108.27,2606.3 70.87,2606.3 70.87,2681.1 125.98,2681.1 133.86,2673.23 133.86,2639.76 145.67,2627.95 303.15,2627.95 303.15,2537.4
  region net N17929106: 1694.88,2809.06 1767.72,2809.06 1777.56,2799.21 1777.56,2746.06 1783.46,2740.16 1832.68,2740.16 1832.68,2751.97 1809.06,2751.97 1803.15,2757.87 1803.15,2781.5 1811.02,2789.37 1840.55,2789.37 1840.55,3043.31 1781.5,3043.31 1781.5,2960.63 1775.59,2954.72 1706.69,2954.72 1694.88,2942.91 1694.88,2809.06
  region net VCC5V0_USB: 1015.75,2198.82 1163.39,2198.82 1163.39,2139.76 1015.75,2139.76 1015.75,2198.82
  region net VCC12V: 5438.98,2350.39 5427.17,2350.39 5427.17,2303.15 5391.73,2267.72 5391.73,2220.47 5372.05,2200.79 5372.05,2129.92 5435.04,2129.92 5435.04,2181.1 5442.91,2188.98 5586.61,2188.98 5586.61,2244.09 5496.06,2244.09 5486.22,2253.94 5486.22,2275.59 5456.69,2275.59 5438.98,2293.31 5438.98,2350.39
  region net GND: 3271.65,1450.79 3202.76,1450.79 3202.76,1312.99 3271.65,1312.99 3271.65,1450.79
  region net VCC5V0_USB: 5771.65,2598.43 5866.14,2598.43 5866.14,2757.87 5771.65,2757.87 5771.65,2598.43
  region net N17929067: 2051.18,2944.88 2200.79,2944.88 2200.79,2911.42 2051.18,2911.42 2051.18,2944.88
  region net VCC_LCD_MIPI_2: 2244.09,2950.79 2309.06,2950.79 2309.06,3281.5 2244.09,3281.5 2244.09,2950.79
  region net VBUS: 4482.28,570.87 4521.65,570.87 4521.65,503.94 4482.28,503.94 4482.28,570.87
  region net VCC3V3_LCD0: 104.33,2681.1 66.93,2681.1 66.93,2606.3 104.33,2606.3 104.33,2681.1
  region net VCC5V_P: 1318.9,2858.27 1427.17,2858.27 1427.17,2809.06 1318.9,2809.06 1318.9,2858.27
  region net VCC5V0_USB: 3188.98,604.33 3279.53,604.33 3279.53,535.43 3188.98,535.43 3188.98,604.33
  region net N19638712: 1462.6,1533.46 1206.69,1533.46 1206.69,1643.7 1462.6,1643.7 1462.6,1533.46
  region net VCC12V_DCIN: 5645.67,3143.7 5543.31,3143.7 5543.31,3027.56 5700.79,3027.56 5700.79,3088.58 5645.67,3143.7
  region net VCC5V_P: 2092.52,2763.78 2198.82,2763.78 2198.82,2722.44 2092.52,2722.44 2092.52,2763.78
  region net VCC5V0_USB: 1011.81,2860.24 1053.15,2860.24 1053.15,2791.34 1011.81,2791.34 1011.81,2860.24
  region net VCC5V0_USB: 1694.88,2785.43 1765.75,2785.43 1765.75,2744.09 1694.88,2744.09 1694.88,2785.43
  region net N17929109: 1919.29,2740.16 1919.29,2779.53 1907.48,2791.34 1895.67,2791.34 1895.67,2911.42 1850.39,2956.69 1850.39,3153.54 1960.63,3153.54 1960.63,2740.16 1919.29,2740.16
  region net BAT_3V7_PLUS: 2598.43,3291.34 2637.8,3291.34 2637.8,3122.05 2598.43,3122.05 2598.43,3291.34
  region net N19638714: 1375.98,1494.09 1462.6,1494.09 1462.6,1409.45 1375.98,1409.45 1375.98,1494.09
  region net N17929067: 2120.08,2978.35 2200.79,2978.35 2200.79,2911.42 2120.08,2911.42 2120.08,2978.35
  region net VCC5V0_USB: 1421.26,2663.39 1236.22,2663.39 1236.22,2625.98 1421.26,2625.98 1421.26,2663.39
  region net 5V0_USB30: 1710.63,352.36 1675.2,352.36 1675.2,224.41 1710.63,224.41 1710.63,352.36
  region net VCC_LEDA2: 1624.02,3364.17 1624.02,3285.43 1635.83,3273.62 1635.83,3190.94 1669.29,3157.48 1805.12,3157.48 1805.12,3074.8 1720.47,3074.8 1687.01,3108.27 1604.33,3108.27 1594.49,3118.11 1594.49,3267.72 1612.2,3285.43 1612.2,3364.17 1624.02,3364.17
  region net VCC3V3_PCIE: 5372.05,2051.18 5561.02,2051.18 5561.02,1921.26 5372.05,1921.26 5372.05,2051.18
  region net N17929067: 2082.68,2984.25 2143.7,2984.25 2143.7,2925.2 2082.68,2925.2 2082.68,2984.25
  region net VCC3V3_SYS: 440.94,2537.4 326.77,2537.4 326.77,2610.24 395.67,2610.24 409.45,2596.46 440.94,2596.46 440.94,2537.4
  region net VCC5V0_USB: 1236.22,2685.04 1303.15,2685.04 1303.15,2631.89 1236.22,2631.89 1236.22,2685.04
  region net VCC12V_DCIN: 5413.39,2933.07 5181.1,2933.07 5181.1,2812.99 5413.39,2812.99 5413.39,2933.07
  region net VCC_LCD_MIPI_2: 2273.62,3281.5 2074.8,3281.5 2074.8,3305.12 2059.06,3305.12 2059.06,3273.62 2096.46,3236.22 2228.35,3236.22 2263.78,3200.79 2273.62,3200.79 2273.62,3281.5
Power:
  region net VCC5V0_USB: 1728.35,2767.72 1767.72,2767.72 1767.72,2746.06 1728.35,2746.06 1728.35,2767.72
  region net VCC12V: 5694.88,1748.03 5767.72,1748.03 5767.72,1665.35 5694.88,1665.35 5694.88,1748.03
  region net VCC5V0_USB: 159.45,2015.75 332.68,2015.75 332.68,1937.01 159.45,1937.01 159.45,2015.75
  region net USB_5V_IN: 4584.65,3169.29 4645.67,3169.29 4645.67,3214.57 4584.65,3214.57 4584.65,3169.29
  region net VCC5V0_USB: 2106.3,2840.55 2145.67,2840.55 2145.67,2812.99 2106.3,2812.99 2106.3,2840.55
  region net BAT_3V7_LOSE: 2537.4,3275.59 2576.77,3275.59 2576.77,3248.03 2537.4,3248.03 2537.4,3275.59
Bottom:
  region net VCC5V0_USB: 1124.02,2177.17 1163.39,2177.17 1163.39,2147.64 1124.02,2147.64 1124.02,2177.17
  region net GND: 3273.62,3289.37 3273.62,3220.47 3200.79,3147.64 3088.58,3147.64 3015.75,3220.47 3015.75,3289.37 3273.62,3289.37
  region net VCC5V0_USB: 1011.81,2183.07 1051.18,2183.07 1051.18,2149.61 1011.81,2149.61 1011.81,2183.07
  region net BAT_3V7_PLUS: 2598.43,3255.91 2639.76,3255.91 2639.76,3316.93 2598.43,3316.93 2598.43,3255.91
  region net VCC3V3_SYS: 1084.65,1696.85 1127.95,1696.85 1127.95,1460.63 1084.65,1460.63 1084.65,1696.85
  region net VCC12V_DCIN: 5702.76,3027.56 5517.72,3027.56 5437.01,2946.85 5437.01,2830.71 5242.13,2830.71 5242.13,3003.94 5377.95,3139.76 5649.61,3139.76 5702.76,3086.61 5702.76,3027.56
  region net TR0: 2277.56,421.26 2299.21,421.26 2299.21,385.83 2277.56,385.83 2277.56,421.26
  region net VCC5V0_USB: 592.52,2187.01 592.52,2143.7 631.89,2143.7 631.89,2187.01 592.52,2187.01
  region net USB_5V_IN: 4645.67,3212.6 4570.87,3212.6 4570.87,3163.39 4645.67,3163.39 4645.67,3212.6
  region net VCC_LEDK2: 1462.6,3334.65 1685.04,3334.65 1685.04,3238.19 1462.6,3238.19 1462.6,3334.65
  region net VCC12V: 5748.03,1537.4 5937.01,1537.4 5937.01,1624.02 5748.03,1624.02 5748.03,1537.4
  region net USB_5V_IN: 5149.61,3047.24 5094.49,3047.24 5094.49,3106.3 5149.61,3106.3 5149.61,3047.24
  region net VCC5V0_USB: 5844.49,2679.13 5783.46,2679.13 5783.46,2631.89 5824.8,2590.55 5827.76,2593.5 5866.14,2593.5 5866.14,2657.48 5844.49,2679.13
  region net VCC5V_P: 2185.04,2763.78 2210.63,2763.78 2210.63,2724.41 2185.04,2724.41 2185.04,2763.78
  region net BAT_3V7_LOSE: 2537.4,3253.94 2578.74,3253.94 2578.74,3316.93 2537.4,3316.93 2537.4,3253.94
  region net GND: 3021.65,3381.89 3096.46,3381.89 3096.46,3218.5 3021.65,3218.5 3021.65,3381.89
  region net VCC12V: 5391.73,2275.59 5452.76,2275.59 5452.76,2194.88 5391.73,2194.88 5391.73,2275.59
  region net TR3: 2427.17,462.6 2448.82,462.6 2448.82,427.17 2427.17,427.17 2427.17,462.6
  region net VCC3V3_SD_1: 4751.97,429.13 4787.4,429.13 4787.4,322.83 4751.97,322.83 4751.97,429.13
  region net +5V_INPUT: 4545.28,2704.72 4657.48,2704.72 4657.48,2610.24 4545.28,2610.24 4545.28,2704.72
  region net VCC5V0_USB: 657.48,3145.67 683.07,3145.67 683.07,3106.3 657.48,3106.3 657.48,3145.67
  region net VCC_LCD_MIPI_2: 2096.46,3269.68 2057.09,3269.68 2057.09,3311.02 2023.62,3344.49 2055.12,3344.49 2055.12,3342.52 2096.46,3301.18 2096.46,3269.68
  region net 5V0_USB30: 1675.2,267.72 1710.63,267.72 1710.63,226.38 1675.2,226.38 1675.2,267.72
  region net GND: 3057.09,3397.64 3273.62,3397.64 3273.62,3238.19 3057.09,3238.19 3057.09,3397.64
  region net VCC5V0_USB: 1383.86,2663.39 1346.46,2663.39 1346.46,2624.02 1383.86,2624.02 1383.86,2663.39
  region net VCC5V0_USB2: 3968.5,295.28 4025.59,295.28 4049.21,318.9 4049.21,511.81 4057.09,519.68 4244.09,519.68 4244.09,586.61 4003.94,586.61 3984.25,566.93 3984.25,344.49 3976.38,336.61 3954.72,336.61 3954.72,309.06 3968.5,295.28
  region net +5V_INPUT: 5722.44,2688.98 5501.97,2688.98 5501.97,2610.24 5722.44,2610.24 5722.44,2688.98
  region net VCC5V0_USB: 1011.81,2830.71 1051.18,2830.71 1051.18,2799.21 1011.81,2799.21 1011.81,2830.71
  region net USB_5V_IN: 3425.2,3364.17 3466.54,3364.17 3466.54,3261.81 3425.2,3261.81 3425.2,3364.17
  region net VCC12V: 5706.69,1732.28 5765.75,1732.28 5765.75,1537.4 5706.69,1537.4 5706.69,1732.28
  region net VCC12V: 5421.26,2194.88 5584.65,2194.88 5584.65,2250 5421.26,2250 5421.26,2194.88
  region net VCC5V_P: 1395.67,2724.41 1362.2,2724.41 1362.2,2685.04 1395.67,2685.04 1395.67,2724.41
  region net VCC5V0_USB: 1736.22,2783.46 1767.72,2783.46 1767.72,2744.09 1736.22,2744.09 1736.22,2783.46
GND (plane layer: these items are gaps in the copper):
  lines w3.94: -155.51,-157.48 6181.1,-157.48 6181.1,3423.23 -155.51,3423.23 -155.51,-157.48
Multi-Layer:
  lines w3.94: 5970.47,3163.39 5970.47,3222.44 6031.5,3222.44 6031.5,3163.39 5970.47,3163.39